# Altium PCB DS130-1.0-A G-M传感器.PcbDoc
Units mm, origin at the board's own origin, x right, y up, seen from the top; angles counter-clockwise.
Board outline 41.25 x 64.25 mm, 2 copper layers (Top Layer, Bottom Layer), stack 1.581 mm thick; 31 components, 35 nets, 171 pads, 58 vias.
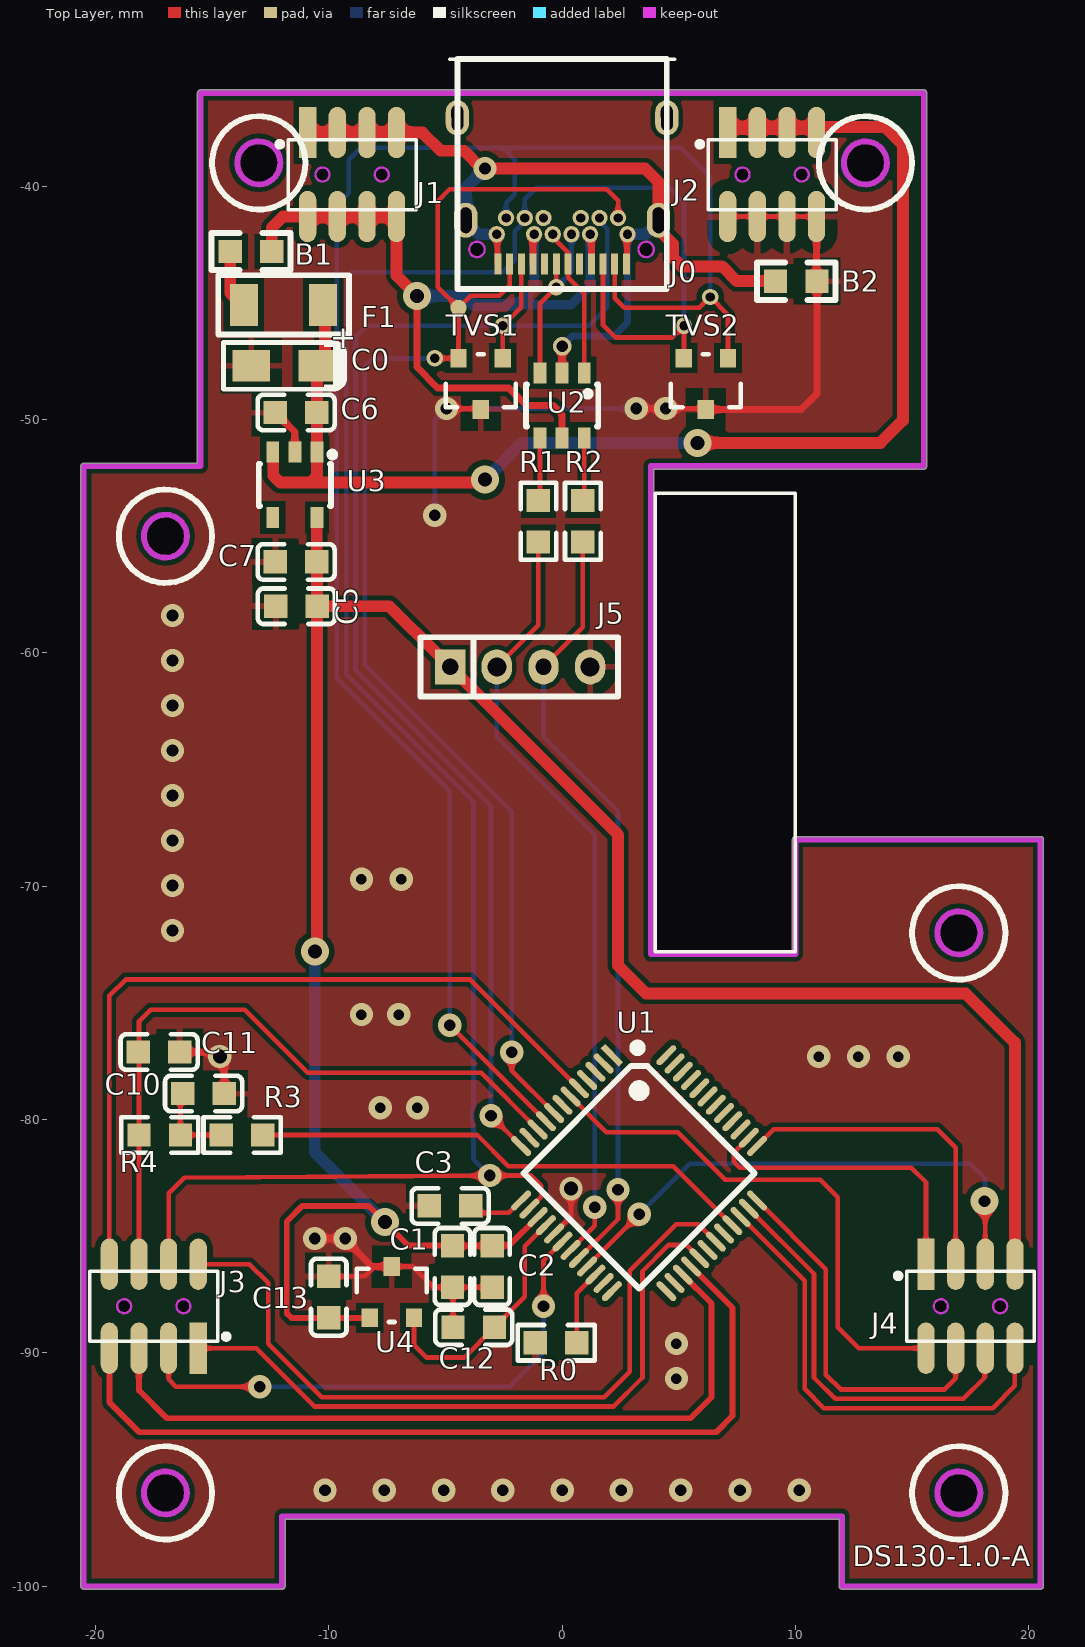
[diagram p0: Top Layer view]
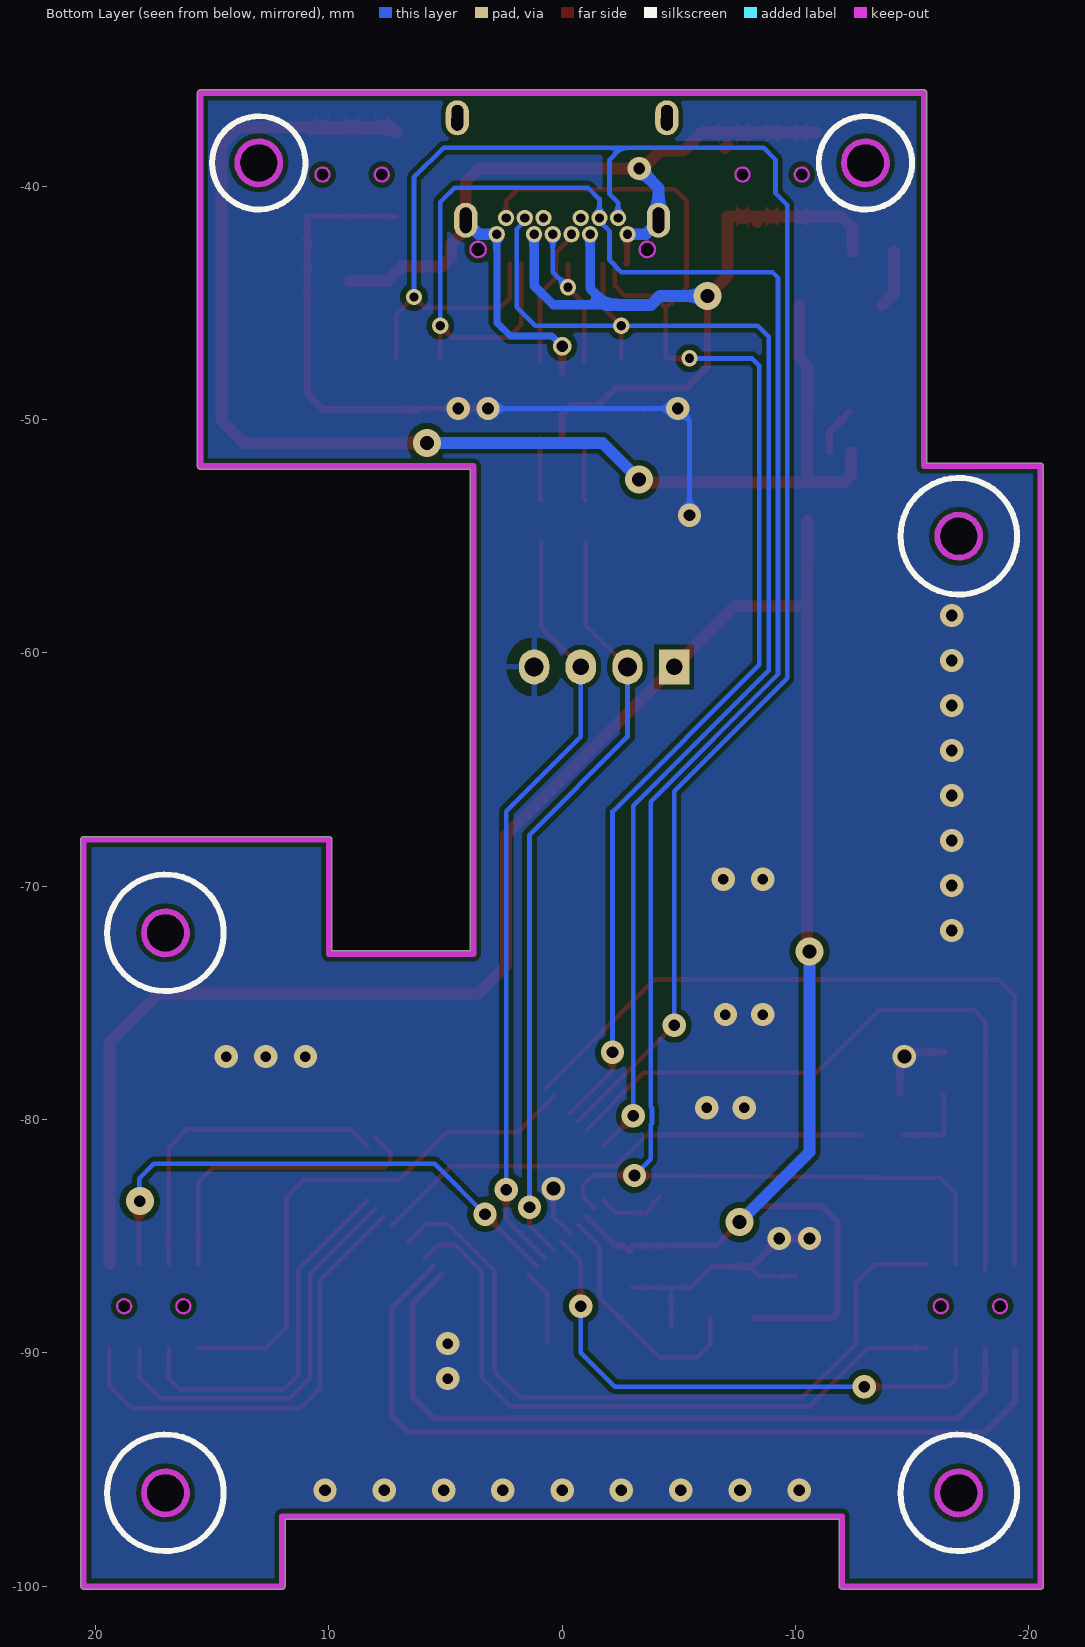
[diagram p1: Bottom Layer view, seen from below]

## Layer stack, top to bottom
Top Solder: solder mask 0.0102, Solder Resist, Dk 3.5
Top Layer: signal copper 0.0356
Dielectric 1: dielectric 1.51, FR-4, Dk 4.8
Bottom Layer: signal copper 0.0356
Bottom Solder: solder mask 0.0102, Solder Resist, Dk 3.5

## Board outline
-20.5,-100.127 -12,-100.127 ccw(c-12,-100) -11.873,-100 -11.873,-97.127 11.873,-97.127 11.873,-100 ccw(c12,-100) 12,-100.127 20.5,-100.127 ccw(c20.5,-100) 20.627,-100 20.627,-68 ccw(c20.5,-68) 20.5,-67.873 10,-67.873 ccw(c10,-68) 9.873,-68 9.873,-72.773 3.927,-72.773 3.927,-52.127 15.5,-52.127 ccw(c15.5,-52) 15.627,-52 15.627,-36 ccw(c15.5,-36) 15.5,-35.873 -15.5,-35.873 ccw(c-15.5,-36) -15.627,-36 -15.627,-51.873 -20.5,-51.873 ccw(c-20.5,-52) -20.627,-52 -20.627,-100 ccw(c-20.5,-100)
cut-out: -17.9,-55 ccw(c-17,-55) -17,-55.9 ccw(c-17,-55) -16.1,-55 ccw(c-17,-55) -17,-54.1 ccw(c-17,-55)
cut-out: 16.1,-96 ccw(c17,-96) 17,-96.9 ccw(c17,-96) 17.9,-96 ccw(c17,-96) 17,-95.1 ccw(c17,-96)
cut-out: -17.9,-96 ccw(c-17,-96) -17,-96.9 ccw(c-17,-96) -16.1,-96 ccw(c-17,-96) -17,-95.1 ccw(c-17,-96)
cut-out: 16.1,-72 ccw(c17,-72) 17,-72.9 ccw(c17,-72) 17.9,-72 ccw(c17,-72) 17,-71.1 ccw(c17,-72)
cut-out: 12.1,-39 ccw(c13,-39) 13,-39.9 ccw(c13,-39) 13.9,-39 ccw(c13,-39) 13,-38.1 ccw(c13,-39)
cut-out: -13.9,-39 ccw(c-13,-39) -13,-39.9 ccw(c-13,-39) -12.1,-39 ccw(c-13,-39) -13,-38.1 ccw(c-13,-39)

## Design rules (kind name [scope] priority, off if disabled: settings)
Clearance [All] p1: gap=0.254 ignorepadtopadclearanceinfootprint=FALSE except(0: Arc-Hole Track-Hole SMDPad-Hole THPad-Hole Via-Hole Fill-Hole Poly-Hole Region-Hole Text-Hole; 0.1: THPad-THPad; 0.15: Arc-SMDPad Arc-THPad Track-SMDPad Track-THPad SMDPad-SMDPad; 0.2: Arc-Arc Arc-Track Arc-Via Arc-Fill Arc-Poly Arc-Region Arc-Text Track-Track Track-Via Track-Fill Track-Poly Track-Region Track-Text SMDPad-THPad SMDPad-Text THPad-Fill THPad-Poly THPad-Region)
MinimumSolderMaskSliver [All] p1: minsoldermaskwidth=0.2
PlaneConnect [All] p1: planeconnectstyle=Relief reliefexpansion=0.508 reliefentries=4 reliefconductorwidth=0.254 reliefairgap=0.508
PolygonConnect GND [All] p1: thpad.connectstyle=Relief thpad.reliefconductorwidth=0.254 thpad.reliefentries=4 thpad.polygonreliefangle="90 Angle" thpad.airgapwidth=0.508 smdpad.connectstyle=Relief smdpad.reliefconductorwidth=0.254 smdpad.reliefentries=4 smdpad.polygonreliefangle="90 Angle" smdpad.airgapwidth=0.508 via.connectstyle=Direct via.reliefconductorwidth=0.254 via.reliefentries=4 via.polygonreliefangle="90 Angle" via.airgapwidth=0.254
PolygonConnect VSS [InNet('VSS') vs InNet('VSS')] p2: thpad.connectstyle=Relief thpad.reliefconductorwidth=0.508 thpad.reliefentries=4 thpad.polygonreliefangle="90 Angle" thpad.airgapwidth=0.508 smdpad.connectstyle=Relief smdpad.reliefconductorwidth=0.508 smdpad.reliefentries=4 smdpad.polygonreliefangle="90 Angle" smdpad.airgapwidth=0.508 via.connectstyle=Direct via.reliefconductorwidth=0.508 via.reliefentries=4 via.polygonreliefangle="90 Angle" via.airgapwidth=0.254
RoutingVias [All] p1: holewidth=0.6 width=1 viastyle="Through Hole" minholewidth=0.4 minwidth=0.8 maxholewidth=1 maxwidth=2
SilkToSilkClearance [All] p1: silktosilkclearance=0.1
SilkToSolderMaskClearance [IsPad] p1: minsilkscreentomaskgap=0.05 clearancetoexposedcopper=TRUE
SolderMaskExpansion [All] p1: expansion=0.102 istentingtop=FALSE
Width [All] p1: maxlimit=1 minlimit=0.2 preferedwidth=0.2
26 further rules are at their usual default settings.

## Components (designator, comment, footprint, x,y, rotation, side; value= is the part's Value field where it differs from the comment)
B1 "CBM160808U102" 0603BEAD -13.335,-42.799 r180 top
B2 "CBM160808U102" 0603BEAD 10.033,-44.069 r0 top
C0 "AVX_10uF/16V ±10％(C106)" AVX_3216-18(1206)_SMD -11.91,-47.7 r180 top value=10uF
C1 "SMDCAP00013" 0603CAP -4.7,-86.3 r90 top value=100nF
C2 "SMDCAP00012" 0603CAP -3,-86.3 r90 top value=4.7uF
C3 "SMDCAP00015" 0603CAP -4.8,-83.7 r0 top value=1uF
C5 "SMDCAP00013" 0603CAP -11.39,-58 r0 top value=100nF
C6 "SMDCAP00015" 0603CAP -11.4,-49.7 r0 top value=1uF
C7 "SMDCAP00015" 0603CAP -11.4,-56.1 r0 top value=1uF
C10 "SMDCAP00013" 0603CAP -15.366,-78.885 r180 top value=100nF
C11 "SMDCAP00013" 0603CAP -17.272,-77.107 r180 top value=100nF
C12 "SMDCAP00013" 0603CAP -3.79,-88.9 r0 top value=100nF
C13 "SMDCAP00013" 0603CAP -10,-87.61 r270 top value=100nF
F1 "SMD1206-050C-16V" 1206FUSE -11.938,-45.085 r0 top value="16V /0.5A"
J0 "USB_Type_C_24P" USB_TYPE_C_24P_RECEPTACLE 0,-40.2 r180 top locked
J1 "X1321FVS-2x04-C43D48" X1321FVS-2X04-C43D48 -9,-39.5 r0 top locked value=2*4P
J2 "X1321FVS-2x04-C43D48" X1321FVS-2X04-C43D48 9,-39.5 r0 top locked value=2*4P
J3 "X1321FVS-2x04-C43D48" X1321FVS-2X04-C43D48 -17.5,-88 r180 top locked value=2*4P
J4 "X1321FVS-2x04-C43D48" X1321FVS-2X04-C43D48 17.5,-88 r0 top locked value=2*4P
J5 "DIP4单排直针  间距2mm 针长11mm 铜" H4 -4.8,-60.6 r0 top value=4P
R0 "Chip 0R 1/16W ±1％ 0603" 0603RES -0.256,-89.564 r0 top value=0R
R1 "Chip 22R 1/16W ±1％ 0603" 0603RES -1.016,-54.356 r90 top value=22R
R2 "Chip 22R 1/16W ±1％ 0603" 0603RES 0.889,-54.356 r90 top value=22R
R3 "SMDRES00090" 0603RES -13.716,-80.663 r180 top value=3.3K
R4 "SMDRES00090" 0603RES -17.246,-80.663 r180 top value=3.3K
TVS1 "MMBZ9V1A" SOT23 -3.49,-48.471 r180 top
TVS2 "MMBZ9V1A" SOT23 6.157,-48.471 r180 top
U1 "STC32G12K128_35I LQFP48" LQFP-48 3.3,-82.3 r315 top value=STC32G12K128
U2 "82400102" SOT23-6 0,-49.4 r180 top
U3 "ME6211C33M5G-N" SOT23-5 -11.45,-52.8 r180 top
U4 "REF3025" SOT23 -7.3,-87.4 r0 top value=丝印R30C

## Footprints (in the part's own frame and the unit in brackets; to place one, negate y for a bottom-side part, rotate by r counter-clockwise, add the part's x,y. Pads: shape width x height; smd on the part's side, far side on the other; paste and mask are expansions set on the pad)
0603BEAD [mm]
  rect 1x1 smd: 1(-0.889,0) 2(0.889,0)
  silkscreen extent -1.69,-0.8 1.69,0.8, body extent -0.9,-0.48 0.85,0.48, height 0.95
0603CAP [mm]
  rect 1x1 smd: 1(-0.889,0) 2(0.89,0)
  silkscreen extent -1.65,-0.76 1.65,0.76, body extent -0.8,-0.4 0.8,0.4, height 0.3
0603RES [mm]
  rect 1x1 smd: 1(-0.889,0) 2(0.889,0)
  silkscreen extent -1.65,-0.76 1.65,0.76, body extent -0.8,-0.41 0.8,0.41, height 0.51
1206FUSE [mm]
  rect 1.2x1.8 smd: 1(-1.7,0) 2(1.7,0)
  silkscreen extent -2.8,-1.27 2.8,1.27, body extent -1.6,-0.83 1.6,0.83, height 1.46
AVX_3216-18(1206)_SMD [mm]
  rect 1.6x1.35 smd: 1(-1.41,0) 2(1.41,0)
  silkscreen extent -2.6,-1 2.6,1, body extent -1.7,-0.84 1.7,0.84, height 1.71
H4 [mm]
  rect 1.3x1.5 hole 0.7: 1(0,0)
  oval 1.3x1.5 hole 0.813: 2(2,0) 4(6,0)
  oval 1.3x1.5 hole 0.7: 3(4,0)
  silkscreen extent -1.27,-1.27 7.2,1.27, body extent -0.97,-1 6.98,1, height 6
LQFP-48 [mm]
  rect 1.1x0.27 smd mask+0.08: 1(-4.4,2.75)
  oval 1.1x0.27 smd mask+0.08: 2(-4.4,2.25) 3(-4.4,1.75) 4(-4.4,1.25) 5(-4.4,0.75) 6(-4.4,0.25) 7(-4.4,-0.25) 8(-4.4,-0.75) 9(-4.4,-1.25) 10(-4.4,-1.75) 11(-4.4,-2.25) 12(-4.4,-2.75) 25(4.4,-2.75) 26(4.4,-2.25) 27(4.4,-1.75) 28(4.4,-1.25) 29(4.4,-0.75) 30(4.4,-0.25) 31(4.4,0.25) 32(4.4,0.75) 33(4.4,1.25) 34(4.4,1.75) 35(4.4,2.25) 36(4.4,2.75)
  oval 0.27x1.1 smd mask+0.08: 13(-2.75,-4.4) 14(-2.25,-4.4) 15(-1.75,-4.4) 16(-1.25,-4.4) 17(-0.75,-4.4) 18(-0.25,-4.4) 19(0.25,-4.4) 20(0.75,-4.4) 21(1.25,-4.4) 22(1.75,-4.4) 23(2.25,-4.4) 24(2.75,-4.4) 37(2.75,4.4) 38(2.25,4.4) 39(1.75,4.4) 40(1.25,4.4) 41(0.75,4.4) 42(0.25,4.4) 43(-0.25,4.4) 44(-0.75,4.4) 45(-1.25,4.4) 46(-1.75,4.4) 47(-2.25,4.4) 48(-2.75,4.4)
  silkscreen extent -3.95,-3.5 3.5,3.85, body extent -4.51,-4.5 4.5,4.5, height 1.54
SOT23 [mm]
  rect 0.7x0.8 smd: 1(-0.95,-1.1) 2(0.95,-1.1) 3(0,1.1)
  silkscreen extent -1.5,-1.27 1.5,1, body extent -1.46,-1.17 1.46,1.17, height 1
SOT23-5 [mm] "SOT-23/SC-74A; 5 Leads; Body 3.1 x 3 mm, inc. leads (LxW max)"
  rect 0.55x0.9 smd: 1(-0.95,-1.4) 2(0,-1.4) 3(0.95,-1.4) 4(0.95,1.4) 5(-0.95,1.4)
  silkscreen extent -1.7,-1.4 1.55,0.9, body extent -1.45,-1.4 1.45,1.4, height 1.45
SOT23-6 [mm] "SOT-23/SC-74A; 5 Leads; Body 3.1 x 3 mm, inc. leads (LxW max)"
  rect 0.55x0.9 smd: 1(-0.95,-1.4) 2(0,-1.4) 3(0.95,-1.4) 4(0.95,1.4) 5(0,1.4) 6(-0.95,1.4)
  silkscreen extent -1.55,-0.9 1.55,0.9, body extent -1.45,-1.4 1.45,1.4, height 1.45
USB_TYPE_C_24P_RECEPTACLE [mm]
  oval 1x1.5 hole 0.5 slot 1.1 at 90.5 deg: 0(-4.49,-3.13) 0(-4.13,1.26) 0(4.13,1.26) 0(4.49,-3.13)
  rect 0.3x0.9 smd mask+0.1: A1(-2.75,3.13) A2(-2.25,3.13) A3(-1.75,3.13) A4(-1.25,3.13) A5(-0.75,3.13) A6(-0.25,3.13) A7(0.25,3.13) A8(0.75,3.13) A9(1.25,3.13) A10(1.75,3.13) A11(2.25,3.13) A12(2.75,3.13)
  round 0.7 hole 0.4: B1(2.8,1.86) B2(2.4,1.16) B3(1.6,1.16) B4(1.2,1.86) B5(0.8,1.16) B6(0.4,1.86) B7(-0.4,1.86) B8(-0.8,1.16) B9(-1.2,1.86) B10(-1.6,1.16) B11(-2.4,1.16) B12(-2.8,1.86)
  Keep-Out Layer board cut-out: -3.93,2.51 -3.905,2.384 -3.833,2.277 -3.726,2.205 -3.6,2.18 -3.6,2.18 -3.474,2.205 -3.367,2.277 -3.295,2.384 -3.27,2.51 -3.27,2.51 -3.295,2.636 -3.367,2.743 -3.474,2.815 -3.6,2.84 -3.6,2.84 -3.726,2.815 -3.833,2.743 -3.905,2.636 -3.93,2.51
  Keep-Out Layer board cut-out: 3.98,2.51 3.955,2.384 3.883,2.277 3.776,2.205 3.65,2.18 3.65,2.18 3.524,2.205 3.417,2.277 3.345,2.384 3.32,2.51 3.32,2.51 3.345,2.636 3.417,2.743 3.524,2.815 3.65,2.84 3.65,2.84 3.776,2.815 3.883,2.743 3.955,2.636 3.98,2.51
  silkscreen extent -4.48,-5.66 4.48,4.21, body extent -4.87,-5.66 4.88,4.21, height 3.36
X1321FVS-2X04-C43D48 [mm]
  rect 0.74x2.2 smd: 1(-1.905,1.8)
  oval 0.74x2.2 smd: 2(-1.905,-1.8) 3(-0.635,1.8) 4(-0.635,-1.8) 5(0.635,1.8) 6(0.635,-1.8) 7(1.905,1.8) 8(1.905,-1.8)
  Keep-Out Layer board cut-out: 1.57,0 1.547,0.115 1.482,0.212 1.385,0.277 1.27,0.3 1.27,0.3 1.155,0.277 1.058,0.212 0.993,0.115 0.97,0 0.97,0 0.993,-0.115 1.058,-0.212 1.155,-0.277 1.27,-0.3 1.27,-0.3 1.385,-0.277 1.482,-0.212 1.547,-0.115 1.57,0
  Keep-Out Layer board cut-out: -1.57,0 -1.547,-0.115 -1.482,-0.212 -1.385,-0.277 -1.27,-0.3 -1.27,-0.3 -1.155,-0.277 -1.058,-0.212 -0.993,-0.115 -0.97,0 -0.97,0 -0.993,0.115 -1.058,0.212 -1.155,0.277 -1.27,0.3 -1.27,0.3 -1.385,0.277 -1.482,0.212 -1.547,0.115 -1.57,0
  Keep-Out Layer circle w0.1: c1.27,0 r0.3
  Keep-Out Layer circle w0.1: c-1.27,0 r0.3
  silkscreen extent -3.2,-1.5 2.74,1.5, body extent -2.75,-2.39 2.74,2.44, height 4.54

## Part data
B1 B2: library part "Chip Ferrite Bead 0606", "贴片磁珠"
C0: "钽电容"
C1 C5 C10 C11 C12 C13: library part "MLCC 100nF 50V ±10％ 0603", "贴片电容"
C2: library part "MLCC 4.7uF 50V ±10％ 0603", "贴片电容"
C3 C6 C7: library part "MLCC 1uF 50V ±10％ 0603", "贴片电容"
F1: "贴片自恢复保险丝 16V /0.5A"
J1 J2 J3 J4: "双排母2x4P 立贴 1.27mm"
J5: "单排直针"
R0 R1 R2: "贴片电阻"
R3 R4: library part "Chip 3.3K 1/16W ±1％ 0603", "贴片电阻"
TVS1 TVS2: library part TVS, "瞬态抑制二极管"
U1: "单片机芯片"
U2: "瞬态抑制二极管(TVS)"
U3: "稳压芯片"

## Free pads (board coordinates)
  round 0.7 smd mask+0.102: 2(-4.44,-45.217)

## Via types
v1: diameter 1, hole 0.5, Top Layer to Bottom Layer, tented both sides, 33 vias
v2: diameter 1, hole 0.45, Top Layer to Bottom Layer, tented both sides, 11 vias
v3: diameter 1.2, hole 0.6, Top Layer to Bottom Layer, tented both sides, 5 vias
v4: diameter 0.7, hole 0.4, Top Layer to Bottom Layer, tented both sides, 5 vias
v5: diameter 1, hole 0.6, Top Layer to Bottom Layer, tented both sides, 2 vias
v6: diameter 1.2, hole 0.5, Top Layer to Bottom Layer, tented both sides, 1 vias
v7: diameter 0.8, hole 0.5, Top Layer to Bottom Layer, tented both sides, 1 vias

## Nets (pads, with @x,y where several pads share a name; then routed paths per layer and width w, separated by ;. In a path a pad name is that pad's centre, name@x,y a point inside that pad or via, vN(x,y) a via of type N, cw(c..) or ccw(c..) an arc to the next point about the centre after c; other vN are vias at no path point)
ADC0: J3.8 U1.5 | length 33.8
  Top Layer w0.2: J3.8 -19.405,-74.7 -18.705,-74 -3.939,-74 U1.5
ADC1: J4.2 U1.6 | length 23
  Top Layer w0.2: U1.6 1.901,-80.547 4.951,-80.547 6.983,-82.579 11.059,-82.579 11.811,-83.331 11.811,-88.899 12.712,-89.8 J4.2
ADC_Vref: C12.2 U1.16 U4.2 | length 10.7
  Top Layer w0.2: U4.2 -6.35,-89.65 -5.8,-90.2 -4.2,-90.2 C12.2 -1.6,-87.6 -1.6,-85.432 U1.16
D+_I/O1: J0.A6 J0.B6 U2.1 | length 6
  Top Layer w0.2: J0.B6 -0.4,-42.179 0.25,-42.829 J0.A6 0.266,-43.346 0.266,-43.93 0.95,-44.613 0.95,-47.498
D-_I/O2: J0.A7 J0.B7 U2.3 | length 7
  Top Layer w0.2: -0.95,-47.498 -0.95,-45.032 v4(-0.25,-44.332) J0.A7
  Bottom Layer w0.2: v4(-0.25,-44.332) 0.4,-43.682 J0.B7
DAC_OUT: C11.2 J3.6 R4.2 U1.10 | length 30.1
  Top Layer w0.2: C11.2 -18.135,-77.08 -18.135,-75.8 -17.635,-75.3 -13.6,-75.3 -10.9,-78 -3.475,-78 U1.10 ; J3.6@-18.135,-86.487 J3.6 C11.2@-18.135,-77.107
Dis1_red_EN: J4.4 U1.36 | length 16
  Top Layer w0.2: U1.36 11.303,-86.414 11.303,-90.931 11.938,-91.566 16.391,-91.566 16.865,-91.092 J4.4
Dis2_green_EN: J4.6 U1.35 | length 17.7
  Top Layer w0.2: U1.35 10.795,-86.613 10.795,-91.058 11.703,-91.966 17.2,-91.966 18.112,-91.054 J4.6@18.112,-89.823
Dis3_blue_EN: J4.8 U1.34 | length 19.9
  Top Layer w0.2: U1.34 10.393,-86.918 10.393,-91.545 11.214,-92.366 18.451,-92.366 19.405,-91.412 J4.8
GND: B2.2 C0.2 C1.1 C2.1 C3.1 C5.1 C6.1 C7.1 C10.1 C11.1 C12.1 C13.1 J2.2 J2.4 J2.6 J2.8 J5.4 R0.1 TVS1.3 TVS2.3 U1.17 U3.2 U4.3 | length 53.9
  Top Layer w0.2: C13.1 -8.452,-86.721 -8.081,-86.35 ; U4.3 -6.4,-86.3 -5.511,-87.189 C1.1 ; v1(-4.953,-49.53) -3.531,-49.53 TVS1.3 TVS1.3@-3.49,-49.621 ; C12.1 -4.679,-87.21 C1.1 ; C2.1 C1.1 ; U1.17 0.379,-84.16 v5(0.379,-82.96) ; v1(3.175,-49.53) v1(4.445,-49.53) 6.116,-49.53 TVS2.3 ; J2.2 J2.4 J2.6 J2.8
  Top Layer w0.3: C11.1 -14.859,-77.107 -14.477,-77.489 C10.1 ; C6.1 -11.45,-50.539 U3.2 ; v1(-10.6,-85.1) v1(-9.3,-85.1) -9.3,-85.144 -8.144,-86.3 U4.3 ; TVS2.3 10.246,-49.571 10.922,-48.895 B2.2 10.905,-44.052 J2.8
  Bottom Layer w0.2: v1(-5.461,-54.102) -5.461,-50.038 v1(-4.953,-49.53) v1(3.175,-49.53)
  other v1: -10.16,-95.885 -7.62,-95.885 -5.08,-95.885 -2.54,-95.885 0,-95.885 2.54,-95.885 5.08,-95.885 7.62,-95.885 10.16,-95.885 -16.7,-71.9 -16.7,-69.971 -16.7,-68.043 -16.7,-66.114 -16.7,-64.186 -16.7,-62.257 -16.7,-60.329 -16.7,-58.4
  other v2: 4.9,-91.1 4.9,-89.6 -7.8,-79.5 -6.2,-79.5 11,-77.3 12.7,-77.3 14.4,-77.3 -8.6,-75.5 -7,-75.5 -8.6,-69.7 -6.9,-69.7
  other v5: -14.668,-77.298
I2C1_SCL: J4.1 U1.38 | length 13.4
  Top Layer w0.2: U1.38 7.364,-81.418 7.364,-81.817 7.618,-82.071 14.971,-82.071 15.595,-82.695 J4.1
I2C1_SDA: J4.3 U1.37 | length 14.1
  Top Layer w0.2: U1.37 9.069,-80.42 16.085,-80.42 16.865,-81.2 J4.3
KEY_HOME: J4.5 U1.21 | length 22.8
  Top Layer w0.2: U1.21 v1(3.305,-84.063) ; v6(18.1,-83.5) 18.135,-83.535 J4.5
  Bottom Layer w0.2: v1(3.305,-84.063) 5.468,-81.9 17.5,-81.9 18.126,-82.526 18.126,-83.474 v6(18.1,-83.5)
NetB1_2: B1.2 F1.1 | length 2.5
  Top Layer w0.508: B1.2 -14.224,-44.577 F1.1@-13.716,-45.085
NetC10_2: C10.2 R3.2 R4.1 | length 3.6
  Top Layer w0.2: C10.2 -16.357,-78.986 R4.1 R3.2
P3.0/D-/RxD: J5.2 R1.1 U1.19 | length 33.2
  Top Layer w0.2: J5.2 -1.016,-58.816 R1.1 ; U1.19 1.395,-84.559 v1(1.395,-83.759)
  Bottom Layer w0.2: J5.2 -2.8,-63.6 1.395,-67.795 v1(1.395,-83.759)
P3.1/D+/TxD: J5.3 R2.1 U1.20 | length 33.4
  Top Layer w0.2: J5.3 0.889,-58.911 R2.1 ; U1.20 2.395,-84.265 v1(2.395,-83.003)
  Bottom Layer w0.2: J5.3 -0.8,-63.6 2.395,-66.795 v1(2.395,-83.003)
P3.3: R0.2 U1.22 | length 3.2
  Top Layer w0.2: R0.2 0.633,-87.442 U1.22
PWM: R3.1 U1.33 | length 21.7
  Top Layer w0.2: R3.1 -3.637,-80.663 -2.3,-82 4.768,-82 U1.33
SPI1/SPI2_CS: J0.A3 J0.B3 J3.4 TVS2.2 U1.14 | length 92.9
  Top Layer w0.2: J3.4 -16.865,-83.158 -16.201,-82.494 v1(-3.1,-82.4) -1.324,-82.4 -0.891,-82.833 -0.891,-83.309 U1.14 ; J0.A3 1.75,-45.946 2.286,-46.482 4.713,-46.482 v4(5.221,-45.974) 5.221,-47.357 TVS2.2
  Bottom Layer w0.2: v1@-2.876,-82.624 -3.8,-81.7 -3.8,-80.22 -3.85,-80.17 -3.85,-79.508 -3.8,-79.458 -3.8,-66.373 -9.252,-60.921 -9.252,-43.923 -9.017,-43.688 -2.54,-43.688 -2.032,-43.18 -2.032,-41.927 -1.6,-41.495 J0.B3 -1.6,-40.551 -1.11,-40.061 4.605,-40.061 5.221,-40.677 v4(5.221,-45.974)
SPI1_MISO: J0.A11 J0.B11 pad.2 TVS1.2 U1.8 | length 59.3
  Top Layer w0.2: v4(-5.461,-47.371) TVS1.2 pad.2 ; J0.A11 -2.25,-44.249 -2.694,-44.693 -3.916,-44.693 pad.2 ; v1(-2.161,-77.118) -2.161,-77.9 U1.8 ; J0.B11 2.4,-40.627 1.905,-40.132 -4.826,-40.132 -5.334,-40.64 -5.334,-44.323 pad.2
  Bottom Layer w0.2: v4(-5.461,-47.371) -5.476,-47.386 -8.143,-47.386 -8.452,-47.695 -8.452,-60.509 -2.161,-66.8 v1@-2.161,-77.416
SPI1_MOSI: J0.A10 J0.B10 TVS1.1 U1.12 | length 57.6
  Top Layer w0.2: v1(-3.05,-79.839) U1.12 ; TVS1.1 v4(-2.54,-45.974) -1.75,-45.184 J0.A10
  Bottom Layer w0.2: v1@-3.05,-80.148 -3.05,-66.546 -8.852,-60.744 -8.852,-46.444 -8.382,-45.974 v4(-2.54,-45.974) 1.143,-45.974 1.938,-45.179 1.938,-41.833 1.6,-41.495 J0.B10
SPI1_SCK: J0.A2 J0.B2 TVS2.1 U1.9 | length 78.7
  Top Layer w0.2: v1(-4.81,-75.957) U1.9 ; J0.A2 2.25,-44.795 2.667,-45.212 5.884,-45.212 v4(6.35,-44.746) 7.107,-45.503 TVS2.1
  Bottom Layer w0.2: v1(-4.81,-75.957) -4.81,-65.929 -9.652,-61.087 -9.652,-40.806 -9.144,-40.298 -9.144,-38.862 -8.636,-38.354 -2.54,-38.354 ; J0.B2 -2.4,-40.707 -2.032,-40.339 -2.032,-38.862 -2.54,-38.354 ; v4(6.35,-44.746) 6.35,-39.624 5.08,-38.354 -2.54,-38.354
SPI2_MISO: J3.1 U1.29 | length 28.3
  Top Layer w0.2: J3.1 -13.1,-89.8 -10.6,-92.3 2.2,-92.3 3.446,-91.054 3.446,-86.497 4.57,-85.373 5.312,-85.373 U1.29
SPI2_MOSI: J3.3 U1.18 | length 23.2
  Top Layer w0.2: J3.3 -16.865,-91.135 -16.549,-91.451 v1(-12.954,-91.451) ; v1(-0.8,-88) -0.8,-86.046 U1.18
  Bottom Layer w0.2: v1(-12.954,-91.451) -2.251,-91.451 -0.8,-90 v1(-0.8,-88)
SPI2_SCK: J3.2 U1.31 | length 32
  Top Layer w0.2: J3.2 -13.4,-86.2 -12.6,-87 -12.6,-89.6 -10.3,-91.9 1.8,-91.9 2.9,-90.8 2.9,-86.477 4.893,-84.484 5.838,-84.484 U1.31
UCAP: C3.2 U1.13 | length 2.9
  Top Layer w0.2: C3.2@-4.165,-83.319 C3.2@-3.847,-83.637 ; C3.2 -3.61,-84 -2.289,-84 U1.13
USART2_RXD: J3.5 U1.27 | length 33
  Top Layer w0.254: J3.5 -18.135,-91.604 -16.939,-92.8 5.5,-92.8 6.4,-91.9 6.4,-87.875 U1.27
USART2_TXD: J3.7 U1.28 | length 37
  Top Layer w0.254: J3.7 -19.405,-92.112 -18.117,-93.4 6.6,-93.4 7.3,-92.7 7.3,-88.068 U1.28
USB_D+: R2.2 U2.6 | length 2.7
  Top Layer w0.2: R2.2 0.95,-53.406 U2.6
USB_D-: R1.2 U2.4 | length 2.7
  Top Layer w0.2: R1.2 -0.95,-53.401 U2.4
VBUS: B1.1 J0.A4 J0.A9 J0.B4 J0.B9 J1.2 J1.4 J1.6 J1.8 U2.5 | length 37.6
  Top Layer w0.254: J0.A9 J0.A9@-1.227,-43.307 ; J0.B4@-1.227,-42.087 J0.B4 ; J0.B9 J0.B9@1.227,-42.087
  Top Layer w0.3: v3(-6.223,-44.704) -6.223,-47.752 -5.334,-48.641 -2.286,-48.641 -1.524,-49.403 -0.381,-49.403 0,-49.784 U2.5 ; J0.A9 J0.B4@-1.25,-42.11 ; J0.A4 J0.B9@1.25,-42.11
  Top Layer w0.508: B1.1 -12.446,-41.783 -11.963,-41.3 J1.4 -8.472,-41.3 -8.365,-41.407 J1.6@-8.365,-41.546 ; J1.6 J1.8 -7.095,-43.832 v3(-6.223,-44.704)
  Bottom Layer w0.4: J0.B4 -1.2,-44.38 -1.905,-45.085 0.381,-45.085 1.2,-44.266 J0.B9
  Bottom Layer w0.508: v3(-6.223,-44.704) -4.191,-44.704 -3.81,-45.085 -1.905,-45.085
VCC_3V3_MCU: C1.2 C2.2 C5.2 C7.2 C13.2 J4.7 J5.1 U1.15 U3.5 U4.1 | length 101.8
  Top Layer w0.24: -6.6,-85.4 -4.71,-85.4 C1.2 C2.2
  Top Layer w0.254: U4.1 C13.2 -11.6,-88.5 -11.8,-88.3 -11.8,-84.367 -11.133,-83.7 -8.3,-83.7 v3(-7.6,-84.4) -6.6,-85.4 ; C2.2@-2.923,-85.627 -2.861,-85.627 -2.627,-85.393 -2.268,-85.393 U1.15
  Top Layer w0.508: v3(-10.6,-72.8) -10.5,-72.7 C5.2 ; U3.5@-10.516,-54.321 -10.513,-54.324 -10.513,-56.097 C7.2 ; C7.2@-10.478,-56.069 -10.5,-56.047 C5.2 ; J4.7 19.405,-76.705 17.3,-74.6 3.6,-74.6 2.4,-73.4 2.4,-67.8 -4.304,-61.096 -4.404,-61.096 -4.8,-60.7 J5.1 -4.8,-60.5 -5.196,-60.104 -5.296,-60.104 -7.4,-58 C5.2
  Bottom Layer w0.508: v3(-10.6,-72.8) -10.6,-81.4 v3(-7.6,-84.4)
VCC_5V: C0.1 C6.2 F1.2 J2.1 J2.3 J2.5 J2.7 U3.1 U3.3 | length 60.7
  Top Layer w0.2: J2.1 J2.3 J2.5 J2.7
  Top Layer w0.508: U3.3 -12.379,-51.421 -12.379,-52.402 -12.081,-52.7 -10.798,-52.7 ; F1.2@-10.16,-45.085 -10.16,-47.36 C0.1 -10.51,-47.71 C6.2 -10.505,-49.705 -10.505,-51.395 U3.1 -10.5,-52.402 -10.798,-52.7 ; v3(-3.302,-52.578) -3.424,-52.7 -10.798,-52.7 ; v3(5.8,-51) 13.643,-51 14.605,-50.038 14.605,-38.227 13.843,-37.465 7.33,-37.465 J2.1
  Bottom Layer w0.508: v3(-3.302,-52.578) -1.724,-51 v3(5.8,-51)
VSS: B2.1 J0.0@4.13,-41.46 J0.0@-4.13,-41.46 J0.A1 J0.A12 J0.B1 J0.B12 J1.1 J1.3 J1.5 J1.7 U2.2 | length 40.8
  Top Layer w0.254: J0.B1 -2.773,-42.087 -2.773,-43.307 J0.A12 ; J0.A1 2.773,-43.307 2.773,-42.087 J0.B12
  Top Layer w0.3: U2.2 v7(0,-46.857)
  Top Layer w0.508: J1.1 J1.3 J1.5 J1.7 -5.988,-37.7 -5.207,-38.481 -4.196,-38.481 -3.434,-39.243 3.556,-39.243 4.13,-39.817 4.13,-41.46 4.13,-41.843 4.764,-42.478 4.764,-43.075 5.124,-43.434 6.858,-43.434 7.493,-44.069 B2.1 ; J1.7@-7.095,-38.25 J1.7@-6.988,-38.357
  Bottom Layer w0.254: J0.B1@-2.807,-42.053 J0.B1
  Bottom Layer w0.3: v7(0,-46.857) 0.433,-46.424 2.217,-46.424 2.8,-45.841 J0.B12
  Bottom Layer w0.508: J0.0@-4.13,-41.46 -4.13,-40.071 v1(-3.302,-39.243) ; J0.0@-4.123,-41.515 -3.578,-42.06 J0.B1 ; J0.B12 3.578,-42.06 J0.0@4.123,-41.515
pads on no net: J0.0@4.49,-37.07 J0.0@-4.49,-37.07 J0.A5 J0.A8 J0.B5 J0.B8 U1.1 U1.2 U1.3 U1.4 U1.7 U1.11 U1.23 U1.24 U1.25 U1.26 U1.30 U1.32 U1.39 U1.40 U1.41 U1.42 U1.43 U1.44 U1.45 U1.46 U1.47 U1.48 U3.4

## Polygon pours and split planes (outlines as drawn)
GND on Bottom Layer "GND_L02_P000" (solid, remove dead copper, pour order 0): -20.5,-100 -20.5,-52 -15.5,-52 -15.5,-36 15.5,-36 15.5,-52 10,-52 10,-68 20.5,-68 20.5,-100 12,-100 12,-97 -12,-97 -12,-100
GND on Top Layer "GND_L01_P001" (solid, remove dead copper, pour order 1): -20.5,-100 -20.5,-52 -15.5,-52 -15.5,-36 15.5,-36 15.5,-52 10,-52 10,-68 20.5,-68 20.5,-100 12,-100 12,-97 -12,-97 -12,-100

## Keep-outs
Keep-Out Layer:
  circle w0.1: c3.6,-42.71 r0.33
  circle w0.1: c-3.65,-42.71 r0.33
  circle w0.254: c-17,-55 r0.922
  circle w0.254: c17,-72 r0.922
  circle w0.254: c-17,-96 r0.922
  circle w0.254: c17,-96 r0.922
  circle w0.254: c13,-39 r0.922
  circle w0.254: c-13,-39 r0.922
  lines w0.254: -20.5,-100 -12,-100 -12,-97 12,-97 12,-100 20.5,-100 20.5,-68 10,-68 10,-72.9 3.8,-72.9 3.8,-52 4.8,-52 10,-52 15.5,-52 15.5,-36 -15.5,-36 -15.5,-52 -20.5,-52 -20.5,-100

## Silkscreen, mask and mechanical layers (free items; w line width, h text height)
Top Overlay:
  circle w0.254: c17,-72 r2
  circle w0.254: c-13,-39 r2
  circle w0.254: c13,-39 r2
  circle w0.254: c-17,-55 r2
  circle w0.254: c17,-96 r2
  circle w0.254: c-17,-96 r2
  lines w0.15: -4.826,-34.55 4.826,-34.55 ; 4,-72.812 10,-72.812 10,-53.162 4,-53.162 4,-72.812
  text "DS130-1.0-A" at 12.446,-99.441 h1.5
Bottom Overlay:
  circle w0.254: c17,-72 r2.5
  circle w0.254: c-13,-39 r2
  circle w0.254: c13,-39 r2
  circle w0.254: c-17,-55 r2.5
  circle w0.254: c17,-96 r2.5
  circle w0.254: c-17,-96 r2.5
Mechanical 1:
  circle w0.254: c17,-72 r0.9
  circle w0.254: c-13,-39 r0.9
  circle w0.254: c13,-39 r0.9
  circle w0.254: c-17,-55 r0.9
  circle w0.254: c17,-96 r0.9
  circle w0.254: c-17,-96 r0.9
  lines w0.254: -20.5,-100 -12,-100 -12,-97 12,-97 12,-100 20.5,-100 20.5,-68 10,-68 10,-72.9 3.8,-72.9 3.8,-52 10,-52 15.5,-52 15.5,-36 -15.5,-36 -15.5,-52 -20.5,-52 -20.5,-100
Mechanical 15:
  circle w0.254: c0,-79.5 r0.6
  circle w0.254: c0,-71.5 r0.6
  circle w0.254: c0,-63.5 r0.6
  circle w0.254: c0,-55.5 r1.5
  lines w0.508: -16,-51 16,-51

## Text inside footprints (layer, text, board x,y; h text height)
C0: Top Overlay "+" at -8.81,-46.1 h1 r180